# Altium PCB Tartarus Joystick Mod M0.PcbDoc
Units mm, origin at the board's own origin, x right, y up, seen from the top; angles counter-clockwise.
Board outline 30 x 22 mm, 4 copper layers (Top Layer, PWR, GND, Bottom Layer), stack 1.569 mm thick; 31 components, 22 nets, 136 pads, 30 vias.
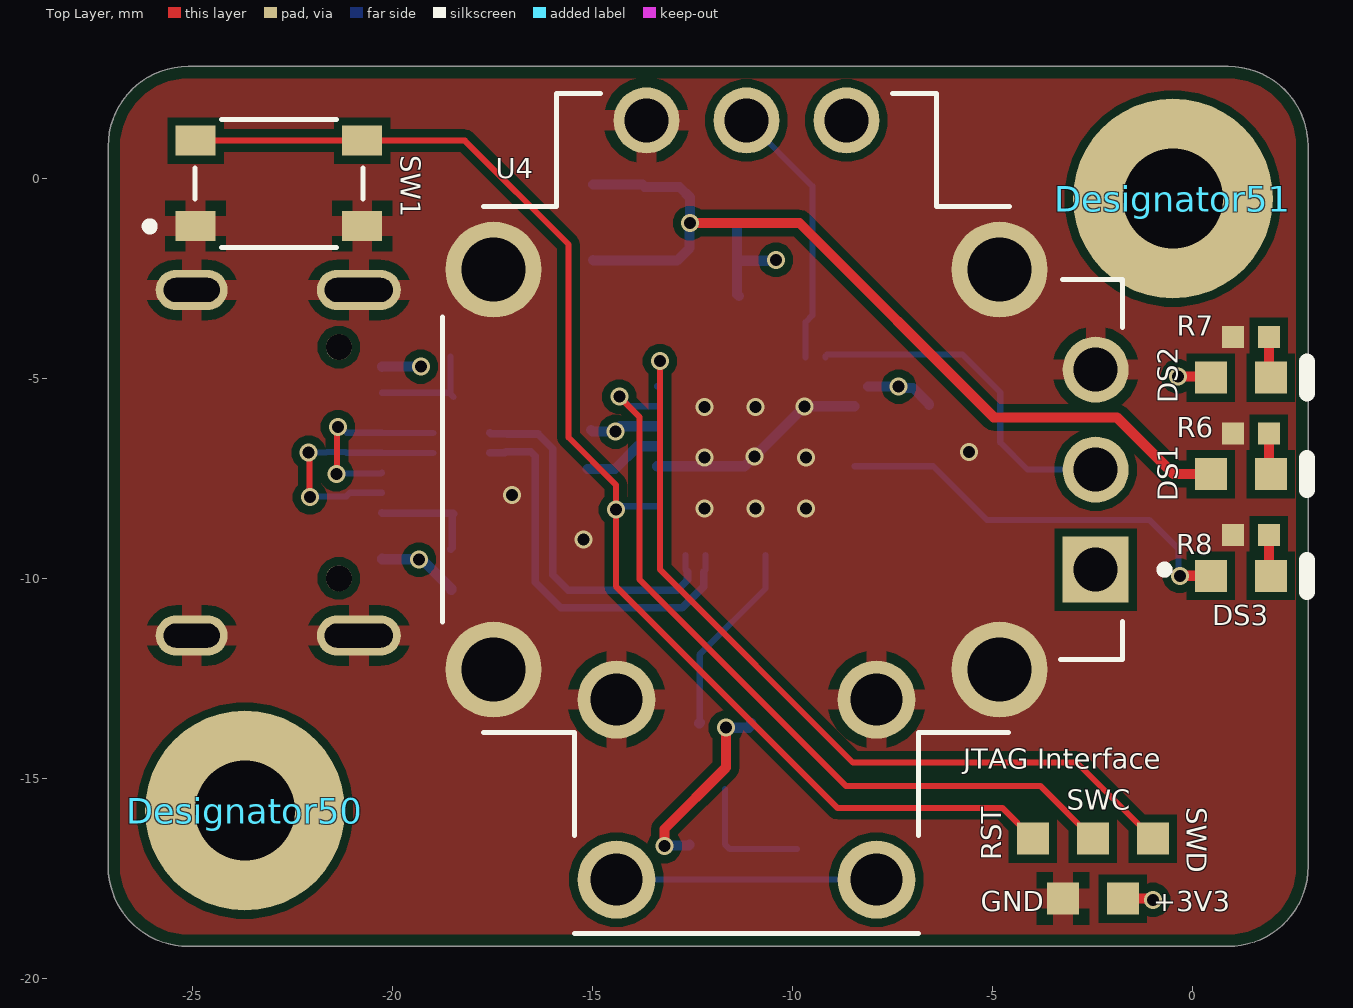
[diagram p0: Top Layer view]
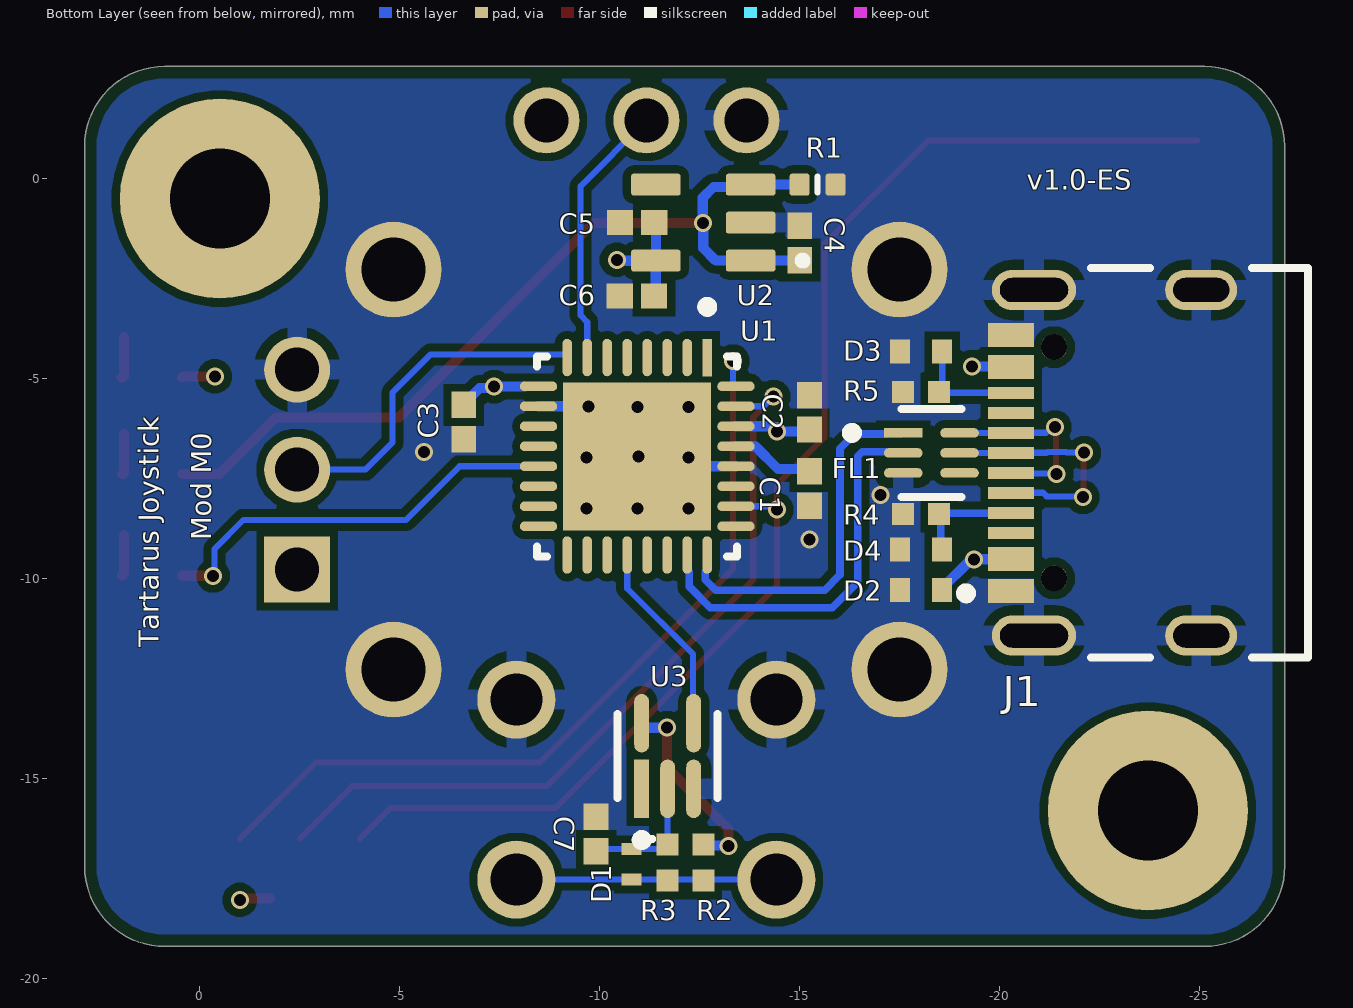
[diagram p1: Bottom Layer view, seen from below]
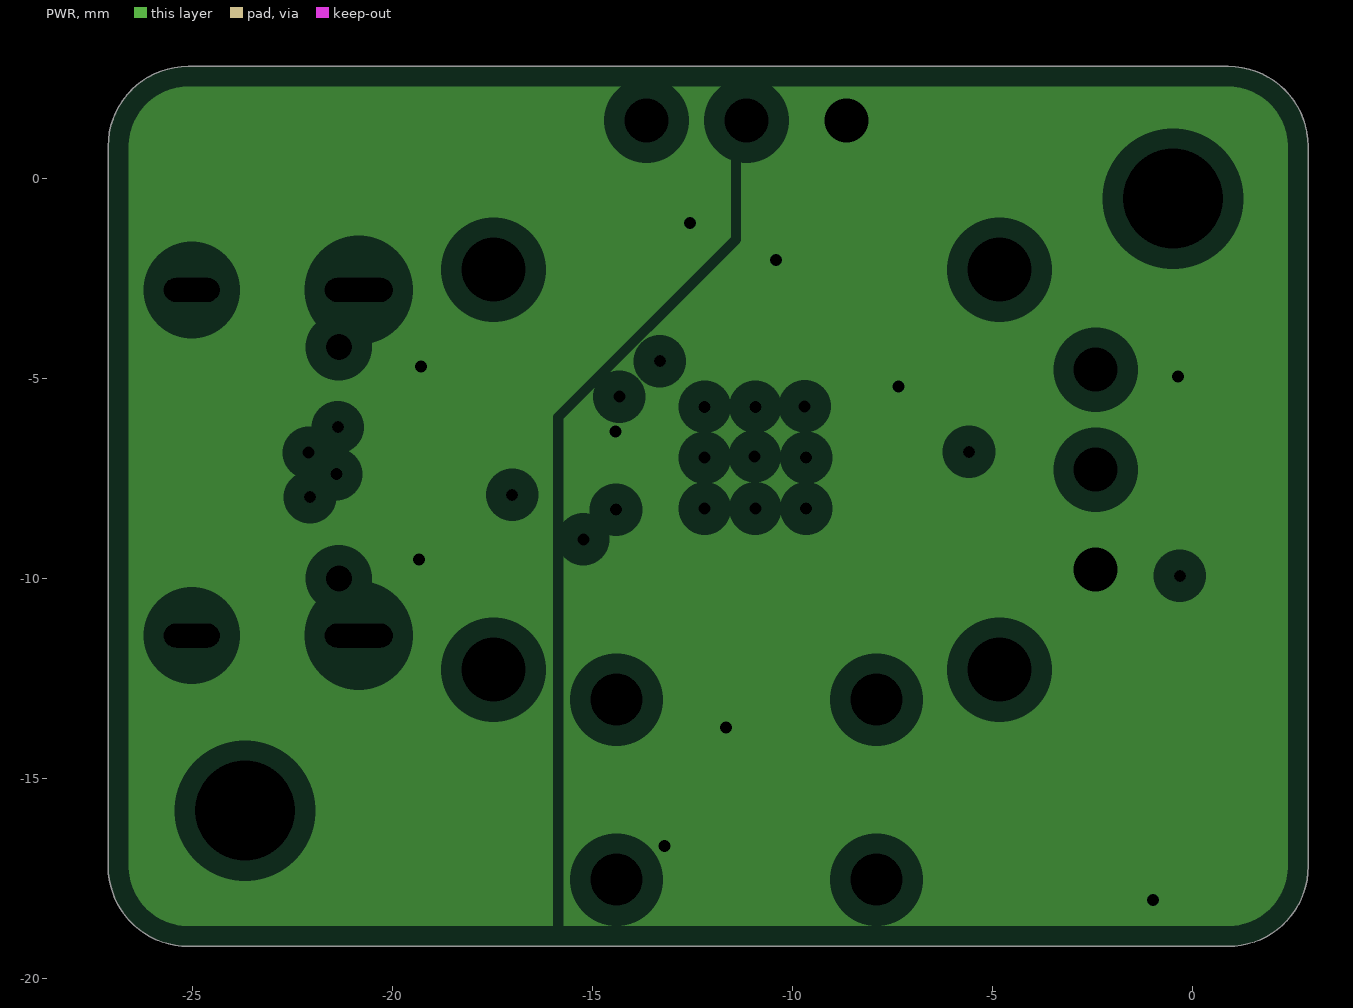
[diagram p2: PWR, clearances drawn from the general rule]
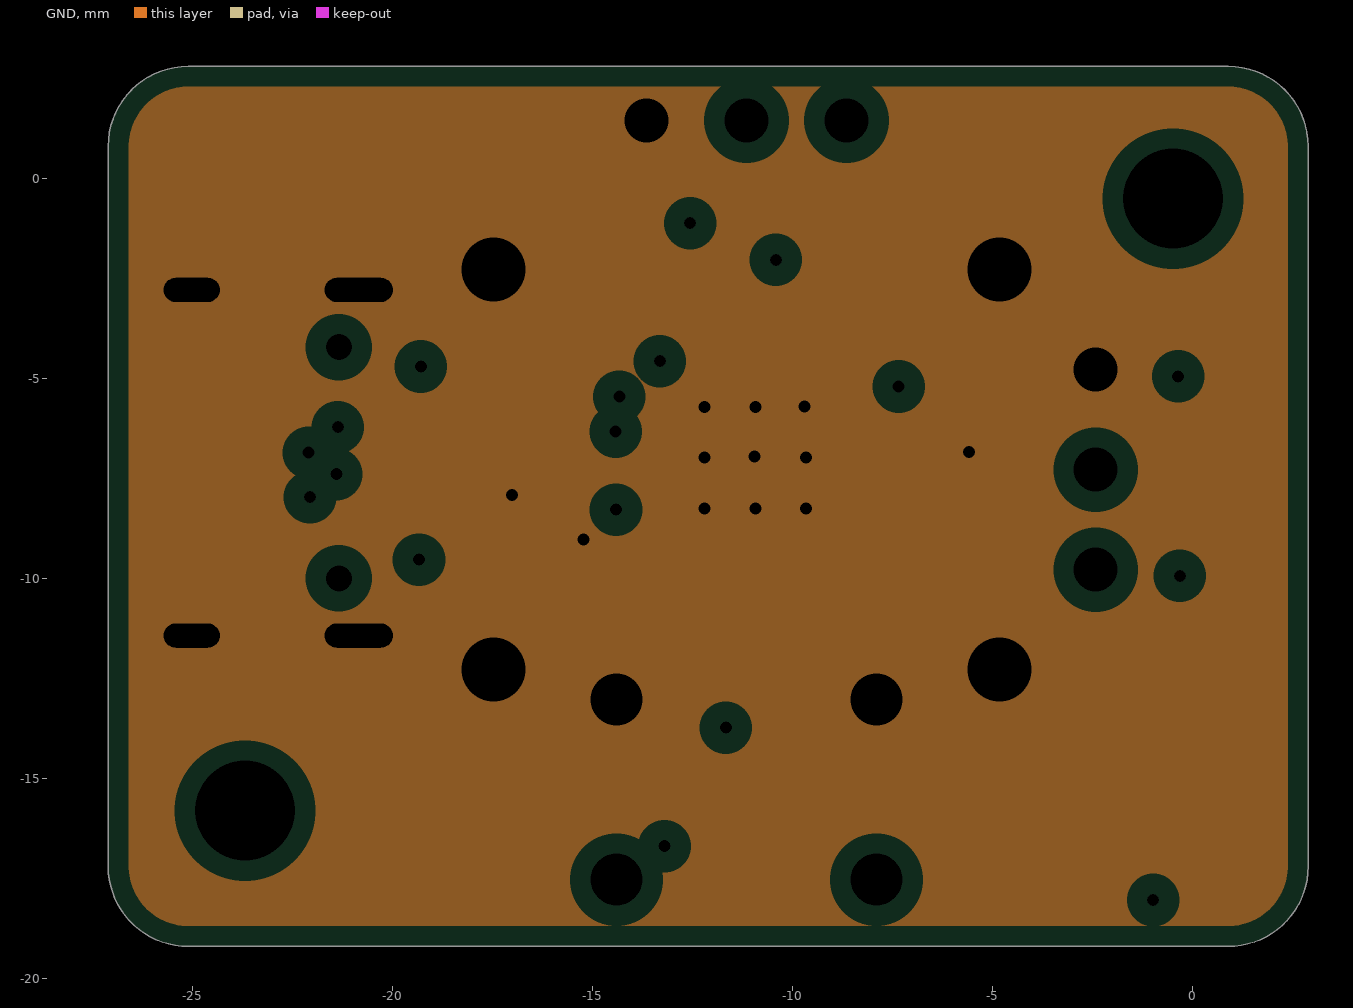
[diagram p3: GND, clearances drawn from the general rule]
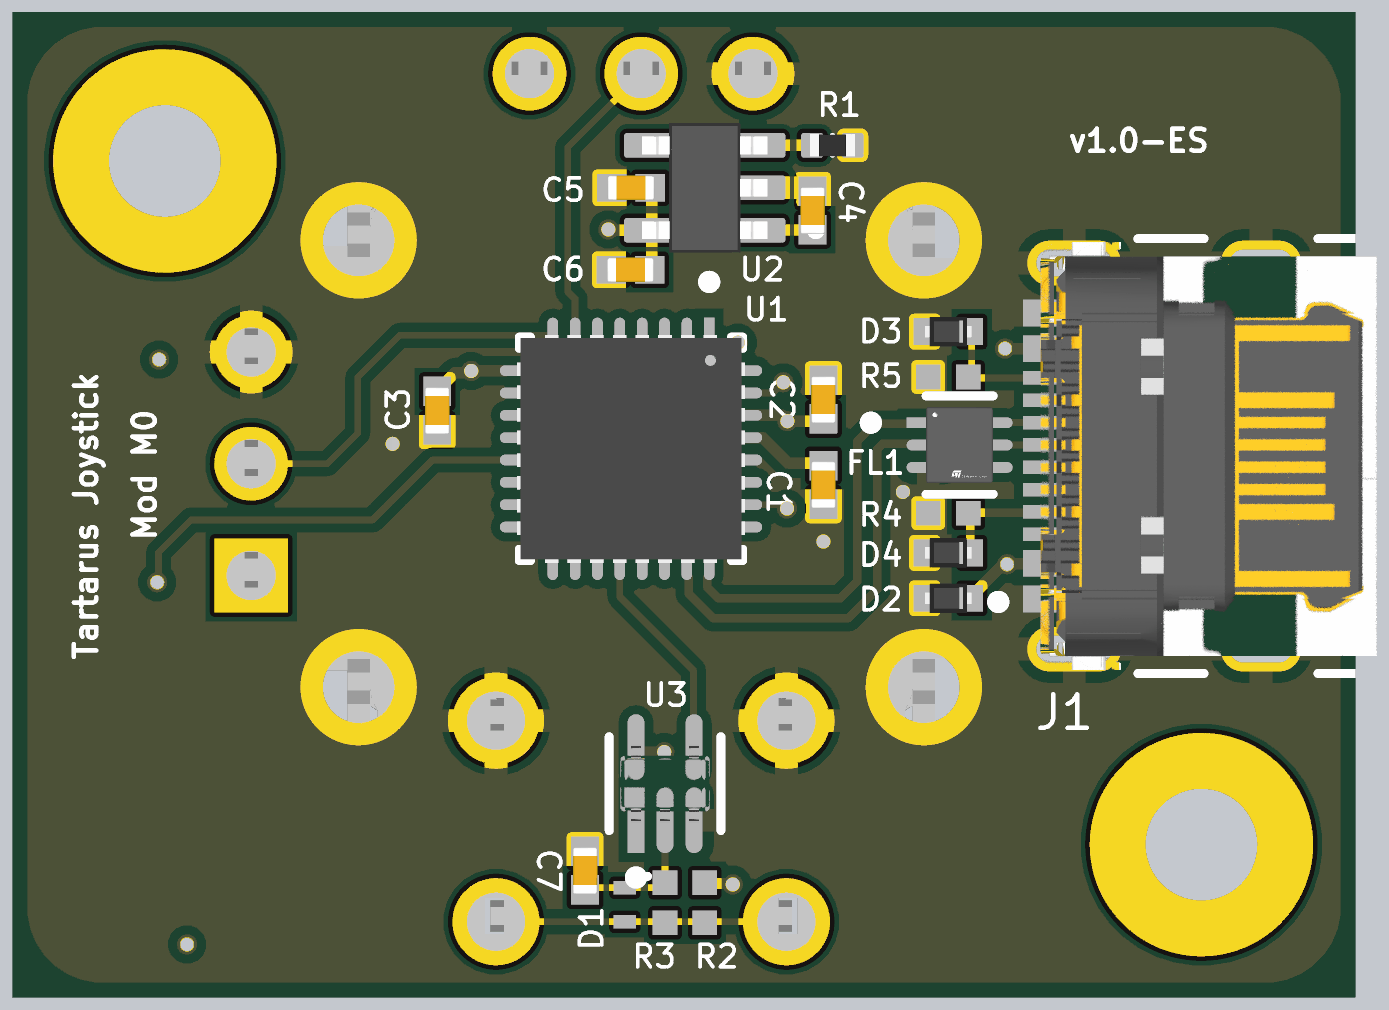
[diagram p4: 3D render of the assembled board from below, using the file's embedded part models]

## Layer stack, top to bottom
Top Solder: solder mask 0.0102, Solder Resist, Dk 3.5
Top Layer: signal copper 0.0356
Dielectric 2: prepreg 0.2184, PP-023, Dk 4.5
PWR: plane copper 0.035, net (Multiple Nets)
Dielectric 1: core 0.9906, Core-042, Dk 4.6
GND: plane copper 0.035, net GND
Dielectric 3: prepreg 0.2184, PP-023, Dk 4.5
Bottom Layer: signal copper 0.0356
Bottom Solder: solder mask 0.0102, Solder Resist, Dk 3.5

## Board outline
-27.12,-17.194 ccw(c-25.12,-17.194) -25.12,-19.194 0.88,-19.194 ccw(c0.88,-17.194) 2.88,-17.194 2.88,0.806 ccw(c0.88,0.806) 0.88,2.806 -25.12,2.806 ccw(c-25.12,0.806) -27.12,0.806

## Design rules (kind name [scope] priority, off if disabled: settings)
BoardOutlineClearance [All] p1: gap=0.3 ignorepadtopadclearanceinfootprint=FALSE except(0.4: Arc-SplitBarrior Arc-SplitContinuation Track-SplitBarrior Track-SplitContinuation SMDPad-SplitBarrior SMDPad-SplitContinuation THPad-SplitBarrior THPad-SplitContinuation Via-SplitBarrior Via-SplitContinuation Fill-SplitBarrior Fill-SplitContinuation Poly-SplitBarrior Poly-SplitContinuation Region-SplitBarrior Region-SplitContinuation Text-SplitBarrior Text-SplitContinuation)
Clearance "Clearance Different Nets" [All] p1: gap=0.2 ignorepadtopadclearanceinfootprint=FALSE except(0.089: Arc-Arc Arc-Track Arc-SMDPad Track-Track Track-SMDPad; 0.127: SMDPad-SMDPad SMDPad-Via THPad-Via Via-Via; 0.254: Arc-Via Arc-Text Track-Via Track-Text SMDPad-Text THPad-Text Via-Text Fill-Text Poly-Text Region-Text Text-Text; 0.5: THPad-THPad Via-Hole)
Clearance "Clearance Same Nets" [All] p2: gap=0.2 ignorepadtopadclearanceinfootprint=FALSE except(0.089: Arc-Arc Arc-Track Arc-SMDPad Track-Track Track-SMDPad SMDPad-SMDPad; 0.127: SMDPad-Via THPad-Via; 0.254: Arc-Via Arc-Text Track-Via Track-Text SMDPad-Text THPad-Text Via-Via Via-Text Fill-Text Poly-Text Region-Text Text-Text)
Clearance "Clearance Bottom Layer" [OnLayer('Bottom Layer')] p3: gap=0.203 ignorepadtopadclearanceinfootprint=TRUE except(0.254: Arc-Text Track-Text SMDPad-Text THPad-Text Via-Text Fill-Text Poly-Text Region-Text Text-Text)
Clearance "Clearance Top Layer" [OnLayer('Top Layer')] p4: gap=0.203 ignorepadtopadclearanceinfootprint=TRUE except(0.254: Arc-Text Track-Text SMDPad-Text THPad-Text Via-Text Fill-Text Poly-Text Region-Text Text-Text)
DiffPairsRouting [All] p1: maxlimit=0.254 minlimit=0.254 mostfreqgap=0.254 toplayer_minwidth=0.381 toplayer_maxwidth=0.381 toplayer_prefwidth=0.381 bottomlayer_minwidth=0.381 bottomlayer_maxwidth=0.381 bottomlayer_prefwidth=0.381 maxuncoupledlength=12.7
HoleSize [All] p1: absolutevalues=TRUE maxlimit=6.3 minlimit=0.2 maxpercent=80.000 minpercent=20.000
MinimumAnnularRing [All] p1: minimumring=0.13
MinimumSolderMaskSliver [All] p1: minsoldermaskwidth=0.1
PlaneClearance [All] p1: clearance=0.508
PlaneConnect [All] p1: planeconnectstyle=Relief reliefexpansion=0.508 reliefentries=4 reliefconductorwidth=0.254 reliefairgap=0.254
PolygonConnect PolygonConnect_1 [All] p1: thpad.connectstyle=Relief thpad.reliefconductorwidth=0.508 thpad.reliefentries=4 thpad.polygonreliefangle="90 Angle" thpad.airgapwidth=0.254 smdpad.connectstyle=Relief smdpad.reliefconductorwidth=0.508 smdpad.reliefentries=4 smdpad.polygonreliefangle="90 Angle" smdpad.airgapwidth=0.254 via.connectstyle=Direct via.reliefconductorwidth=0.508 via.reliefentries=4 via.polygonreliefangle="90 Angle" via.airgapwidth=0.254
RoutingCorners [All] p1: cornerstyle=Round minsetback=2.54 maxsetback=2.54
RoutingVias [All] p1: holewidth=0.5 width=1 viastyle="Through Hole" minholewidth=0.2 minwidth=0.35 maxholewidth=1 maxwidth=2
SilkToSilkClearance [All] p1: silktosilkclearance=0.1
SilkToSolderMaskClearance [IsPad] p1: minsilkscreentomaskgap=0.1 clearancetoexposedcopper=TRUE
SolderMaskExpansion [All] p1: expansion=0.102 istentingtop=FALSE
Width [All] p1: maxlimit=2.54 minlimit=0.089 preferedwidth=0.381
22 further rules are at their usual default settings.

## Classes and differential pairs
component class "Tartarus Joystick Mod M0 IO": D2 D3 D4 DS1 DS2 DS3 FL1 J1 R4 R5 R6 R7 R8
component class "Tartarus Joystick Mod M0": C1 C2 C3 C4 C5 C6 C7 D1 R1 R2 R3 SW1 U1 U2 U3 U4
differential pair USB_D: +USB_D_P -USB_D_N

## Components (designator, comment, footprint, x,y, rotation, side; value= is the part's Value field where it differs from the comment)
C1 "GRM155Z71A105KE01D" CAPC1005X55X30NL05T10 -15.24,-7.747 r270 bottom value=1µF
C2 "04025C104KAT4A" CAPC1005X55X30NL05T10 -15.24,-5.842 r90 bottom value=100nF
C3 "04025C104KAT4A" CAPC1005X55X30NL05T10 -6.596,-6.088 r270 bottom value=100nF
C4 "GRM155Z71A105KE01D" CAPC1005X55X30NL05T10 -14.998,-1.608 r90 bottom value=1µF
C5 "GRM155Z71A105KE01D" CAPC1005X55X30NL05T10 -10.934,-1.1 r0 bottom value=1µF
C6 "GRM155R61A106ME11J" CAPC1005X55X30NL05T10 -10.922,-2.936 r0 bottom value=10uF
C7 "GRM155Z71A105KE01D" CAPC1005X55X30NL05T10 -9.906,-16.383 r90 bottom value=1µF
D1 "CDBQR54" Chip2PinSM127P600-8N -10.795,-17.145 r270 bottom
D2 "CPDQ5V0" MBTB-D-SOD-923F-IMP-0402 -18.034,-10.287 r0 bottom
D3 "CPDQ5V0" MBTB-D-SOD-923F-IMP-0402 -18.034,-4.318 r0 bottom
D4 "CPDQ5V0" MBTB-D-SOD-923F-IMP-0402 -18.034,-9.271 r0 bottom
Designator50 "Comment" PTH-M2D5X5#1 -0.837,-15.644 r0 top
Designator51 "Comment" PTH-M2D5X5#2 -0.5,-0.5 r0 top
DS1 "LTST-C190GKT" LTST-C190GKT_V 1.195,-7.389 r0 top
DS2 "LTST-C190GKT" LTST-C190GKT_V 1.195,-4.976 r0 top
DS3 "LTST-C190GKT" LTST-C190GKT_V 1.195,-9.929 r0 top
FL1 "ECMF02-2AMX6" FP-QFN-6L-IPC_A -18.288,-6.858 r180 bottom
J1 "USB4105-GF-A" FP-USB4105-GF-A-MFG -23.868,-7.104 r90 bottom locked
R1 "100KR2F" RESC0402(1005)_L -15.442,-0.15 r180 bottom value=100k
R2 "MCS04020C5101FE000" RESC1005X40X25NL05T05 -12.585,-17.102 r90 bottom value=5.1k
R3 "MCS04020C2202FE000" RESC1005X40X25NL05T05 -11.696,-17.102 r90 bottom value=10k
R4 "MCS04020C5101FE000" RESC1005X40X25NL05T05 -18.034,-8.382 r0 bottom value=5.1k
R5 "MCS04020C5101FE000" RESC1005X40X25NL05T05 -18.034,-5.334 r0 bottom value=5.1k
R6 "ERJ-2RKF1430X" RESC1005X40X25NL05T05 1.449,-6.373 r180 top value=143
R7 "CRCW040259R0FKED" RESC1005X40X25NL05T05 1.449,-3.96 r180 top value=59
R8 "CRCW040259R0FKED" RESC1005X40X25NL05T05 1.449,-8.913 r180 top value=59
SW1 "TL3365AF180QG" SW_TL3365AF180QG -22.852,-0.119 r0 top
U1 "ATSAMD21E18A-MU" FP-PG-IPC_A -10.934,-6.942 r270 bottom locked
U2 "NCP718BSN330T1G" SOT95P280X100-5N -12.585,-1.1 r0 bottom
U3 "SN74AUP1T14DCKR" FP-DCK0005A-IPC_B -11.696,-14.435 r90 bottom
U4 "THB001P" CNK_THB001P -11.163,-7.276 r0 top locked

## Footprints (in the part's own frame and the unit in brackets; to place one, negate y for a bottom-side part, rotate by r counter-clockwise, add the part's x,y. Pads: shape width x height; smd on the part's side, far side on the other; paste and mask are expansions set on the pad)
CAPC1005X55X30NL05T10 [mm] "Chip Capacitor, 2-Leads, Body 1.05x0.55mm, IPC Medium Density"
  rect 0.66x0.62 smd: 1(-0.43,0) 2(0.43,0)
  body extent -0.53,-0.28 0.53,0.28, height 0.55
Chip2PinSM127P600-8N [mm]
  rect 0.3x0.5 smd: 1(-0.381,0) 2(0.381,0)
  silkscreen extent -0.68,0.46 -0.59,0.56, body extent -0.53,-0.33 0.53,0.33, height 0.55
CNK_THB001P [mm]
  round 1.95 hole 1.3: A(-3.25,-5.75) B(3.25,-5.75) C(-3.25,-10.25) D(3.25,-10.25)
  round 2.4 hole 1.6: S1(6.325,5) S2(-6.325,5) S3(-6.325,-5) S4(6.325,-5)
  rect 1.65x1.65 / inner round 1.65 / far side rect 1.65x1.65 hole 1.1: VR1_1(8.73,-2.5)
  round 1.65 hole 1.1: VR1_2(8.73,0) VR1_3(8.73,2.5) VR2_1(2.5,8.73) VR2_2(0,8.73) VR2_3(-2.5,8.73)
  silkscreen extent -7.6,-11.6 10.55,9.4, body extent -7.6,-11.47 9.67,9.8, height 19.48
FP-DCK0005A-IPC_B [mm]
  rect 1.464x0.376 smd paste+0 mask+0: 1(-0.82,0.65)
  rrect100% 1.464x0.376 smd paste+0 mask+0: 2(-0.82,0) 3(-0.82,-0.65) 4(0.82,-0.65) 5(0.82,0.65)
  silkscreen extent -2.23,-1.25 1.05,1.25, body extent -1.1,-1 1.1,1, height 1.1
FP-PG-IPC_A [mm]
  rect 0.935x0.239 smd paste+0 mask+0: 1(-2.468,1.75)
  rrect100% 0.935x0.239 smd paste+0 mask+0: 2(-2.468,1.25) 3(-2.468,0.75) 4(-2.468,0.25) 5(-2.468,-0.25) 6(-2.468,-0.75) 7(-2.468,-1.25) 8(-2.468,-1.75) 17(2.468,-1.75) 18(2.468,-1.25) 19(2.468,-0.75) 20(2.468,-0.25) 21(2.468,0.25) 22(2.468,0.75) 23(2.468,1.25) 24(2.468,1.75)
  rrect100% 0.239x0.935 smd paste+0 mask+0: 9(-1.75,-2.468) 10(-1.25,-2.468) 11(-0.75,-2.468) 12(-0.25,-2.468) 13(0.25,-2.468) 14(0.75,-2.468) 15(1.25,-2.468) 16(1.75,-2.468) 25(1.75,2.468) 26(1.25,2.468) 27(0.75,2.468) 28(0.25,2.468) 29(-0.25,2.468) 30(-0.75,2.468) 31(-1.25,2.468) 32(-1.75,2.468)
  rect 3.7x3.7 smd paste-1000 mask+0: 33(0,0)
  silkscreen extent -3.86,-2.5 2.5,2.5, body extent -2.55,-2.55 2.55,2.55, height 1.65
FP-QFN-6L-IPC_A [mm]
  rect 0.965x0.239 smd paste+0 mask+0: 1(-0.704,0.5)
  rrect100% 0.965x0.239 smd paste+0 mask+0: 2(-0.704,0) 3(-0.704,-0.5) 4(0.704,-0.5) 5(0.704,0) 6(0.704,0.5)
  silkscreen extent -2.11,-1.1 0.75,1.1, body extent -0.75,-0.85 0.75,0.85, height 0.55
FP-USB4105-GF-A-MFG [mm]
  rrect100% 1x2.1 hole 0.6 slot 1.7 at 90 deg paste-2539.97 mask+0: 1(-4.32,3.015) 2(4.32,3.015)
  rrect100% 1x1.8 hole 0.6 slot 1.4 at 90 deg paste-2539.97 mask+0: 3(-4.32,-1.165) 4(4.32,-1.165)
  rect 0.6x1.15 smd paste+0 mask+0: A1-B12(-3.2,3.59) A4-B9(-2.4,3.59) B1-A12(3.2,3.59) B4-A9(2.4,3.59)
  rect 0.3x1.15 smd paste+0 mask+0: A5(-1.25,3.59) A6(-0.25,3.59) A7(0.25,3.59) A8(1.25,3.59) B5(1.75,3.59) B6(0.75,3.59) B7(-0.75,3.59) B8(-1.75,3.59)
  round 0.65 hole 0.65 unplated paste-2539.97 mask+0: ""(-2.89,2.515) ""(2.89,2.515)
  silkscreen extent -4.86,-3.84 4.86,4.84, body extent -4.79,-3.76 4.79,3.77, height 3.26
LTST-C190GKT_V [mm] "SMD, 2-Leads, Body 1.6x0.8mm"
  rect 0.8x0.8 smd: 1(-0.75,0) 2(0.75,0)
  silkscreen extent 1.65,-0.4 1.65,0.4, body extent -0.8,-0.4 0.8,0.4, height 0.9
MBTB-D-SOD-923F-IMP-0402 [mm]
  rect 0.5x0.6 smd: 1(-0.525,0) 2(0.525,0)
  body extent -0.52,-0.33 0.52,0.33, height 0.82
PTH-M2D5X5#1 [mm]
  round 5 hole 2.5: 1(-22.863,-0.156)
PTH-M2D5X5#2 [mm]
  round 5 hole 2.5: 1(0,0)
RESC0402(1005)_L [mm] "Chip Resistor, Body 1.0x0.5mm, IPC High Density"
  rrect25% 0.5x0.55 smd: 1(-0.45,0) 2(0.45,0)
  silkscreen extent 0,-0.2 0,0.2, body extent -0.5,-0.25 0.5,0.25, height 0.3
RESC1005X40X25NL05T05 [mm] "Chip Resistor, 2-Leads, Body 1.00x0.50mm, IPC Medium Density"
  rect 0.55x0.55 smd: 1(-0.45,0) 2(0.45,0)
  body extent -0.53,-0.27 0.53,0.28, height 0.4
SOT95P280X100-5N [mm]
  rrect25% 1.24x0.55 smd: 1(-1.185,0.95) 2(-1.185,0) 3(-1.185,-0.95) 4(1.185,-0.95) 5(1.185,0.95)
  silkscreen extent -2.58,0.85 -2.38,1.05, body extent -1.4,-1.45 1.4,1.45, height 0.98
SW_TL3365AF180QG [mm]
  rect 1x0.75 smd: 1(-2.083,-1.067) 2(2.083,-1.067) 3(-2.083,1.067) 4(2.083,1.067)
  silkscreen extent -3.33,-1.6 2.1,1.6, body extent -2.25,-1.6 2.25,1.6, height 2.5

## Part data
C1 C4 C5 C7: library part CMP-001-00092-1, "Ceramic Capacitor, Multilayer, Ceramic, 10V, 10% +Tol, 10% -Tol, X7R, 15% TC, 1uF, Surface Mount, 0402", Capacitor Type=X7R, Case/Package=0402, Max Operating Temperature=125°C, Min Operating Temperature=-55°C, Tolerance=10%, Voltage Rating=10V, Mounting Technology="Surface Mount", Pins=2, RoHS Compliant=Yes
C2 C3: library part CMP-001-00090-1, "Ceramic Capacitor, Multilayer, Ceramic, 50V, 10% +Tol, 10% -Tol, X7R, 15% TC, 0.1uF, Surface Mount, 0402", Capacitor Type=X7R, Case/Package=0402, Tolerance=10%, Voltage Rating=50V, Pins=2, RoHS Compliant=Yes
C6: library part CMP-001-00091-1, "Ceramic Capacitor, Multilayer, Ceramic, 10V, 20% +Tol, 20% -Tol, X5R, 15% TC, 10uF, Surface Mount, 0402", Capacitor Type=X5R, Case/Package=0402, Tolerance=20%, Voltage Rating=10V
D1: library part CMP-004-00041-1, "Rectifier Diode, Schottky, 1 Phase, 1 Element, 0.2A, 30V V(RRM), Silicon", Forward Voltage=240mV, Max Operating Temperature=125°C, RoHS Compliant=Yes
D2 D3 D4: library part CMP-004-00042-2, "18.6V Clamp 9.4A (8/20Âµs) Ipp Tvs Diode Surface Mount 0402/SOD-923F", Case/Package="0402 Comchip", Availability=Good, Check_prices=https://www.snapeda.com/parts/CPDQ5V0-HF/Comchip%20Technology/view-part/809934/?ref=eda, Component Type=Standard, Design Item ID=CPDQ5V0-HF, MF="Comchip Technology", MP=CPDQ5V0-HF, Pins=2, Price=None, Purchase-URL=https://pricing.snapeda.com/search/part/CPDQ5V0-HF/?ref=eda, SnapEDA_Link=https://www.snapeda.com/parts/CPDQ5V0-HF/Comchip%20Technology/view-part/809934/?ref=snap, Source=CPDQ5V0-HF.SchLib
DS1 DS2 DS3: library part CMP-007-00022-2, "LED Uni-Color Green, 100 mW, 30 mA, -55 to 85 degC, 2-Pin SMD, RoHS, Tape and Reel", Case/Package=0603, Colour=Green, Forward Current=20mA, Forward Voltage=2.1V, Manufacturer=Lite-On, Max Operating Temperature=85°C, Min Operating Temperature=-55°C, Package Description="2-Pin Surface Mount Device, Body 1.6 x 0.8 mm", Package Quantity=3000, Package Reference=C190GKT, Power=100mW, Datasheet URL=http://datasheet.octopart.com/LTST-C190GKT-Lite-On-datasheet-158530.pdf, Datasheet Version=Dec-06, Illumination Colour=Green, Lens Style=Clear, Luminous Intensity=6mcd, Manufacturer URL=http://www.us.liteon.com/, Mounting Technology=SM, Nominal Vf=2.1V, Packaging=TapeandReel, Pins=2, RoHS Compliant=True, Viewing Angle=130degrees
FL1: library part CMP-00030-00005-1, "Data Line Filter, 2 Function(s), 6 Pin(s), Plastic", Max Operating Temperature=85°C, Min Operating Temperature=-40°C, Mounting Technology="Surface Mount", Pins=6, RoHS Compliant=Yes
J1: library part CMP-002-00095-3, "Conn USB 2.0 Type C RCP 24 POS 0.3mm/0.5mm Solder RA SMD 24 Terminal 1 Port T/R"
R1: library part CMP-009-00064-2, "100K 0.063W 1% 0402 (1005 Metric)  SMD", Case/Package=0402, Power=63mW, Tolerance=1%, Mounting Technology=SMT, Pins=2
R2 R4 R5: library part CMP-009-00205-1, "Fixed Resistor, Thin Film, 0.063W, 5100ohm, 50V, 1% +/-Tol, 50ppm/Cel, Surface Mount, 0402", Case/Package=0402, Max Operating Temperature=125°C, Min Operating Temperature=-55°C, Power=63mW, Tolerance=1%, Mounting Technology="Surface Mount", Pins=2, RoHS Compliant=Yes
R3: library part CMP-009-00206-1, "Fixed Resistor, Thin Film, 0.063W, 22000ohm, 50V, 1% +/-Tol, 50ppm/Cel, Surface Mount, 0402", Case/Package=0402, Max Operating Temperature=125°C, Min Operating Temperature=-55°C, Power=63mW, Tolerance=1%, Mounting Technology=0402, Pins=2, RoHS Compliant=Yes
R6: library part CMP-009-00208-1, "Fixed Resistor, Metal Glaze/thick Film, 0.1W, 143ohm, 50V, 1% +/-Tol, 100ppm/Cel, Surface Mount, 0402", Case/Package=0402, Max Operating Temperature=155°C, Min Operating Temperature=-55°C, Power=100mW, Tolerance=1%, Mounting Technology="Surface Mount", Pins=2, RoHS Compliant=Yes
R7 R8: library part CMP-009-00207-1, "Fixed Resistor, Metal Glaze/thick Film, 0.063W, 59ohm, 50V, 1% +/-Tol, 100ppm/Cel, Surface Mount, 0402", Case/Package=0402, Max Operating Temperature=155°C, Min Operating Temperature=-55°C, Power=63mW, Tolerance=1%, Mounting Technology="Surface Mount", Pins=2, RoHS Compliant=Yes
SW1: library part CMP-011-00019-2, "Tactile Switch SPST-NO Top Actuated Surface Mount", Case/Package=None, Availability="In Stock", Check_prices=https://www.snapeda.com/parts/TL3365AF180QG/E-Switch/view-part/?ref=eda, Component Type=Standard, Design Item ID=TL3365AF180QG, MF=E-Switch, MP=TL3365AF180QG, Pins=4, Price=None, Purchase-URL=https://pricing.snapeda.com/search/part/TL3365AF180QG/?ref=eda, SnapEDA_Link=https://www.snapeda.com/parts/TL3365AF180QG/E-Switch/view-part/?ref=snap, Source=TL3365AF180QG.SchLib
U1: library part CMP-020-00023-1, "RISC Microcontroller, 32-Bit, FLASH, CORTEX-M0 CPU, 48MHz, CMOS", Case/Package=HVQCCN, Clock Frequency=32MHz, Max Operating Temperature=85°C, Max Supply Voltage=3.63V, Min Operating Temperature=-40°C, Min Supply Voltage=1.62V, Nominal Supply Voltage=3.3V, Pins=32, RoHS Compliant=Yes
U2: library part CMP-019-00058-1, "Fixed Positive LDO Regulator, 3.3V, 440V Dropout, PDSO5", RoHS Compliant=Yes
U3: library part CMP-016-00010-1, "Inverter, AUP/ULP/V Series, 1-Func, 1-Input, CMOS, PDSO5", Case/Package=TSSOP, Max Operating Temperature=85°C, Max Supply Voltage=3.6V, Min Operating Temperature=-40°C, Min Supply Voltage=2.3V, Nominal Supply Voltage=2.5V, Logic Type=INVERTER, Pins=5, RoHS Compliant=Yes
U4: library part CMP-062-000000-2, "Joystick, 2 - Axis Analog (Resistive) Output", Package=None, Availability="In Stock", Check_prices=https://www.snapeda.com/parts/THB001P/C%2526K/view-part/?ref=eda, Component Type=Standard, Design Item ID=THB001P, MF=C&K, MP=THB001P, Pin Count=10, Price=None, Purchase-URL=https://pricing.snapeda.com/search/part/THB001P/?ref=eda, SnapEDA_Link=https://www.snapeda.com/parts/THB001P/C%2526K/view-part/?ref=snap, Source=THB001P.SchLib

## Free pads (board coordinates)
  rect 0.8x0.8 smd: 9(-4,-16.5) 9(-3.25,-18) 9(-2.5,-16.5) 9(-1.75,-18) 9(-1,-16.5)

## Via types
v1: diameter 0.45/0.45 (per signal layer), hole 0.3, Top Layer to Bottom Layer, tented both sides, 21 vias
v2: diameter 0.45/0.45 (per signal layer), hole 0.3, Top Layer to Bottom Layer, tented top, 9 vias

## Nets (pads, with @x,y where several pads share a name; then routed paths per layer and width w, separated by ;. In a path a pad name is that pad's centre, name@x,y a point inside that pad or via, vN(x,y) a via of type N, cw(c..) or ccw(c..) an arc to the next point about the centre after c; other vN are vias at no path point)
3V3_IO: C2.1 C3.1 C5.1 C6.1 DS2.1 pad.9@-1.75,-18 R2.2 U1.9 U1.30 U2.5 U3.5 U4.VR1_1 U4.VR2_1 | length 12.9
  Top Layer w0.254: v1(-13.212,-16.691) -13.212,-16.26 -11.679,-14.727 v1(-11.679,-13.728) ; pad.9@-1.75,-18 -1.032,-18 v1(-0.998,-18.034) ; v1(-0.373,-4.945) 0.414,-4.945 DS2.1
  Bottom Layer w0.152: U2.5 U2.5@-11.397,-2.053 ; C5.1@-11.4,-1.136 C5.1
  Bottom Layer w0.254: C2.1@-15.051,-6.285 -15.012,-6.323 v1(-14.434,-6.323) ; v1@-14.464,-6.285 -14.426,-6.247 -14.373,-6.247 -14.318,-6.192 U1.30 ; v1(-13.212,-16.691) -13.192,-16.672 -12.604,-16.672 R2.2 ; v1(-11.679,-13.728) -11.102,-13.728 -11.046,-13.672 U3.5 ; U2.5 C5.1@-11.4,-1.136 ; C6.1 -11.397,-2.891 -11.397,-2.053 -10.448,-2.053 v1(-10.428,-2.032) ; U1.9@-8.125,-5.196 -7.361,-5.196 v1(-7.358,-5.199) -7.32,-5.237 -6.997,-5.237 -6.596,-5.638 C3.1
5V0_VBUS: C4.1 D2.1 DS1.1 J1.A4-B9 J1.B4-A9 R1.1 U2.1 U2.3 | length 25.1
  Top Layer w0.254: v1(-12.573,-1.112) -9.838,-1.112 -4.981,-5.969 -1.905,-5.969 -0.485,-7.389 DS1.1
  Bottom Layer w0.254: J1.A4-B9 -20.267,-9.514 -19.361,-9.514 v1(-19.351,-9.525) ; J1.B4-A9 -20.275,-4.701 -19.306,-4.701 v1(-19.304,-4.699) ; v1@-19.431,-9.525 -19.393,-9.563 -19.233,-9.563 -18.542,-10.254 D2.1@-18.542,-10.287 ; C4.1 -14.992,-2.044 -13.776,-2.044 U2.1 -12.9,-2.05 -12.585,-1.735 -12.585,-1.124 v1(-12.573,-1.112) -12.573,-0.477 -12.839,-0.211 -13.709,-0.211 U2.3 R1.1
DBG_SWC: pad.9@-2.5,-16.5 U1.31 | length 19.8
  Top Layer w0.152: v1(-14.343,-5.453) -13.835,-5.961 -13.835,-10.025 -8.67,-15.19 -3.81,-15.19 pad.9@-2.5,-16.5
  Bottom Layer w0.152: v1(-14.343,-5.453) -14.336,-5.453 -14.097,-5.692 U1.31
DBG_SWD: pad.9@-1,-16.5 U1.32 | length 21
  Top Layer w0.152: v1(-13.327,-4.564) -13.327,-9.771 -8.501,-14.597 -2.903,-14.597 pad.9@-1,-16.5
  Bottom Layer w0.152: U1.32 -13.367,-5.192 -13.327,-5.152 v1(-13.327,-4.564)
GND: C1.2 C2.2 C3.2 C4.2 C5.2 C6.2 C7.2 D2.2 D3.2 D4.2 FL1.3 J1.1 J1.2 J1.3 J1.4 J1.A1-B12 J1.B1-A12 pad.9@-3.25,-18 R1.2 R4.2 R5.2 R6.2 R7.2 R8.2 SW1.1 SW1.2 U1.10 U1.28 U1.33 U2.2 U3.3 U4.A U4.B U4.S1 U4.S2 U4.S3 U4.S4 U4.VR1_3 U4.VR2_3 | length 5.6
  Bottom Layer w0.254: U1.28 -11.21,-7.192 v2(-9.71,-5.692) U1.10
  other v1: -15.24,-9.017 -17.02,-7.906 -5.599,-6.831
  other v2: -12.211,-8.247 -10.941,-8.247 -9.671,-8.247 -12.211,-6.977 -9.671,-6.977 -10.96,-6.942 -12.211,-5.707 -10.941,-5.707
JYSTK_BTN: D1.2 R2.1 R3.1 U4.C U4.D | length 6.5
  Bottom Layer w0.152: U4.C -11.569,-17.526 -10.934,-17.526 -10.299,-17.526 -9.918,-17.526 U4.D
JYSTK_BTN_MCU: U1.20 U3.4 | length 4.9
  Bottom Layer w0.152: U3.4@-12.331,-13.6 -12.331,-11.895 -10.684,-10.248 U1.20
  Bottom Layer w0.254: U3.4 U3.4@-12.331,-13.6
JYSTK_X_AXIS: U1.8 U4.VR1_2 | length 8.7
  Bottom Layer w0.152: U1.8 -9.184,-4.44 -9.143,-4.4 -5.761,-4.4 -4.818,-5.343 -4.818,-6.596 -4.138,-7.276 U4.VR1_2
JYSTK_Y_AXIS: U1.7 U4.VR2_2 | length 6.7
  Bottom Layer w0.152: U4.VR2_2 -9.517,-0.192 -9.517,-3.421 -9.684,-3.588 U1.7
MCU_ALIVE_H: DS3.1 U1.13 | length 10.4
  Top Layer w0.254: v1(-0.329,-9.929) DS3.1
  Bottom Layer w0.152: U1.13 -6.495,-7.192 -5.155,-8.532 -1.091,-8.532 -0.361,-9.262 -0.361,-9.897 v1(-0.329,-9.929)
NetC1_1: C1.1 U1.29 | length 2
  Bottom Layer w0.254: C1.1@-15.139,-7.262 -14.451,-7.262 -13.881,-6.692 U1.29
NetC7_1: C7.1 D1.1 R3.2 U3.2 | length 3.2
  Bottom Layer w0.152: U3.2 R3.2 -11.584,-16.764 D1.1 C7.1@-9.906,-16.764
NetD3_1: D3.1 J1.B5 R5.1 | length 2.8
  Bottom Layer w0.152: J1.B5 -18.591,-5.354 R5.1@-18.559,-5.386 ; D3.1@-18.559,-4.445 R5.1@-18.559,-5.386 ; R5.1@-18.484,-5.461 R5.1@-18.559,-5.386
NetD4_1: D4.1 J1.A5 R4.1 | length 2.7
  Bottom Layer w0.19: J1.A5 -20.264,-8.368 -18.498,-8.368 R4.1 -18.521,-8.42 -18.521,-9.233 D4.1
NetDS1_2: DS1.2 R6.1 | length 1
  Top Layer w0.254: R6.1 1.899,-7.343 ccw(c1.945,-7.343) DS1.2
NetDS2_2: DS2.2 R7.1 | length 1
  Top Layer w0.254: R7.1 1.899,-4.918 ccw(c1.957,-4.918) DS2.2@1.957,-4.976
NetDS3_2: DS3.2 R8.1 | length 1
  Top Layer w0.254: R8.1 1.899,-9.883 DS3.2
RST: pad.9@-4,-16.5 SW1.3 SW1.4 U1.26 | length 33.3
  Top Layer w0.152: SW1.3 SW1.4 -18.204,0.948 -15.613,-1.643 -15.613,-6.469 -14.426,-7.656 v1(-14.426,-8.278) -14.426,-10.196 -8.882,-15.74 -4.76,-15.74 pad.9@-4,-16.5
  Bottom Layer w0.152: v1@-14.259,-8.192 U1.26
USB_D_N: FL1.2 U1.23 | length 9.9
  Bottom Layer w0.152: U1.23@-12.231,-9.828 -12.184,-9.781 U1.23
  Bottom Layer w0.19: FL1.2 -17.208,-6.858 -17.18,-6.83 -16.557,-6.83 -16.446,-6.941 -16.446,-10.09 -15.805,-10.731 -12.764,-10.731 -12.231,-10.198 U1.23@-12.231,-9.828
USB_D_N_CONN: FL1.5 J1.A7 J1.B7 | length 6.1
  Top Layer w0.152: v1(-22.106,-6.852) -22.091,-6.867 -22.091,-7.949 v1(-22.075,-7.965)
  Bottom Layer w0.152: v1(-22.106,-6.852) -21.663,-6.852 -21.646,-6.834 -21.186,-6.834 -21.166,-6.854 J1.A7 -20.276,-6.856 -18.994,-6.856 FL1.5 ; v1(-22.075,-7.965) -22.055,-7.944 -21.169,-7.944 -21.079,-7.854 J1.B7
USB_D_P: FL1.1 U1.24 | length 9.2
  Bottom Layer w0.152: U1.24@-12.691,-9.417 -12.691,-9.774 U1.24@-12.637,-9.828
  Bottom Layer w0.19: FL1.1 -17.56,-6.383 -17.147,-6.383 -17.144,-6.386 -16.373,-6.386 -16.002,-6.757 -16.002,-9.906 -15.621,-10.287 -12.894,-10.287 -12.637,-10.03 U1.24@-12.637,-9.828
USB_D_P_CONN: FL1.6 J1.A6 J1.B6 | length 4.8
  Top Layer w0.152: v1(-21.416,-7.389) -21.403,-7.376 -21.403,-6.239 v1(-21.377,-6.213)
  Bottom Layer w0.152: v1(-21.416,-7.389) -21.398,-7.372 -20.296,-7.372 J1.A6 ; v1(-21.377,-6.213) -21.296,-6.213 -21.156,-6.354 J1.B6 -20.276,-6.356 -18.994,-6.356 FL1.6
pads on no net: Designator50.1 Designator51.1 FL1.4 J1. J1.A8 J1.B8 U1.1 U1.2 U1.3 U1.4 U1.5 U1.6 U1.11 U1.12 U1.14 U1.15 U1.16 U1.17 U1.18 U1.19 U1.21 U1.22 U1.25 U1.27 U2.4 U3.1

## Polygon pours and split planes (outlines as drawn)
GND on Bottom Layer "GND_L04_P000" (solid, remove dead copper, pour order 0): 0.885,2.802 cw(c0.885,0.806) 2.88,0.806 2.88,-17.194 cw(c0.905,-17.194) 0.905,-19.169 -25.144,-19.169 cw(c-25.144,-17.195) -27.118,-17.195 -27.118,0.808 cw(c-25.124,0.808) -25.124,2.802
GND on Top Layer "GND_L01_P003" (solid, pour order 3): 0.885,2.802 cw(c0.885,0.806) 2.88,0.806 2.88,-17.194 cw(c0.905,-17.194) 0.905,-19.169 -25.144,-19.169 cw(c-25.144,-17.195) -27.118,-17.195 -27.118,0.808 cw(c-25.124,0.808) -25.124,2.802
GND on GND (split plane): 1.047,2.289 1.212,2.261 1.373,2.214 1.528,2.15 1.674,2.069 1.81,1.973 1.935,1.861 2.047,1.736 2.144,1.6 2.224,1.454 2.288,1.299 2.335,1.138 2.363,0.973 2.371,0.821 2.37,0.806 2.37,-17.194 2.371,-17.208 2.363,-17.361 2.335,-17.526 2.288,-17.686 2.224,-17.841 2.144,-17.987 2.047,-18.124 1.935,-18.249 1.81,-18.36 1.674,-18.457 1.528,-18.538 1.373,-18.602 1.212,-18.648 1.047,-18.676 0.895,-18.685 0.88,-18.683 -25.12,-18.683 -25.134,-18.685 -25.287,-18.676 -25.452,-18.648 -25.612,-18.602 -25.767,-18.538 -25.913,-18.457 -26.05,-18.36 -26.175,-18.249 -26.286,-18.124 -26.383,-17.987 -26.464,-17.841 -26.528,-17.686 -26.574,-17.526 -26.602,-17.361 -26.611,-17.208 -26.609,-17.194 -26.609,0.806 -26.611,0.821 -26.602,0.973 -26.574,1.138 -26.528,1.299 -26.464,1.454 -26.383,1.6 -26.286,1.736 -26.175,1.861 -26.05,1.973 -25.913,2.069 -25.767,2.15 -25.612,2.214 -25.452,2.261 -25.287,2.289 -25.134,2.297 -25.12,2.296 0.88,2.296 0.895,2.297
5V0_VBUS on PWR (split plane): -25.12,2.296 -11.551,2.296 -11.551,-1.462 -15.959,-5.869 -15.987,-5.911 -15.996,-5.961 -15.996,-18.683 -25.12,-18.683 -25.134,-18.685 -25.287,-18.676 -25.452,-18.648 -25.612,-18.602 -25.767,-18.538 -25.913,-18.457 -26.05,-18.36 -26.175,-18.249 -26.286,-18.124 -26.383,-17.987 -26.464,-17.841 -26.528,-17.686 -26.574,-17.526 -26.602,-17.361 -26.611,-17.208 -26.609,-17.194 -26.609,0.806 -26.611,0.821 -26.602,0.973 -26.574,1.138 -26.528,1.299 -26.464,1.454 -26.383,1.6 -26.286,1.736 -26.175,1.861 -26.05,1.973 -25.913,2.069 -25.767,2.15 -25.612,2.214 -25.452,2.261 -25.287,2.289 -25.134,2.297
3V3_IO on PWR (split plane): 1.047,2.289 1.212,2.261 1.373,2.214 1.528,2.15 1.674,2.069 1.81,1.973 1.935,1.861 2.047,1.736 2.144,1.6 2.224,1.454 2.288,1.299 2.335,1.138 2.363,0.973 2.371,0.821 2.37,0.806 2.37,-17.194 2.371,-17.208 2.363,-17.361 2.335,-17.526 2.288,-17.686 2.224,-17.841 2.144,-17.987 2.047,-18.124 1.935,-18.249 1.81,-18.36 1.674,-18.457 1.528,-18.538 1.373,-18.602 1.212,-18.648 1.047,-18.676 0.895,-18.685 0.88,-18.683 -15.738,-18.683 -15.738,-6.015 -11.33,-1.608 -11.302,-1.566 -11.293,-1.516 -11.293,2.296 0.88,2.296 0.895,2.297

## Other copper
PWR (plane layer: these items are gaps in the copper):
  lines w0.254: -15.867,-18.796 -15.867,-5.961 -11.422,-1.516 -11.422,2.449 -11.617,2.644 ; -9.854,2.898 -1.345,2.898

## Silkscreen, mask and mechanical layers (free items; w line width, h text height)
Top Overlay:
  text "JTAG Interface" at -5.742,-14.759 h0.5
  text "SWD" at -0.154,-15.721 h0.5 r270
  text "SWC" at -3.152,-15.782 h0.5
  text "RST" at -4.799,-17.045 h0.5 r90
  text "GND" at -5.311,-18.322 h0.5
  text "+3V3" at -0.993,-18.322 h0.5
Bottom Overlay:
  text "v1.0-ES" at -20.674,-0.281 h0.5
  text "Mod M0" at -0.281,-9.044 h0.5 r270
  text "Tartarus Joystick" at 1.029,-11.711 h0.5 r270
Mechanical 1:
  lines w1.2: -149.3,-19.2 3.1,-19.2 3.1,82.4 -149.3,82.4 -149.3,-19.2
Board Outline:
  the board outline again, w0.013